# Altium PCB PCB1.PcbDoc (part 2 of 2)
Units mil, origin at the board's own origin, x right, y up, seen from the top; angles counter-clockwise.
Board outline 2521.04 x 1050 mil, 4 copper layers (Layer 1, Layer 2, Layer 3, Layer 4), stack 61.583 mil thick; 66 components, 75 nets, 299 pads, 167 vias.
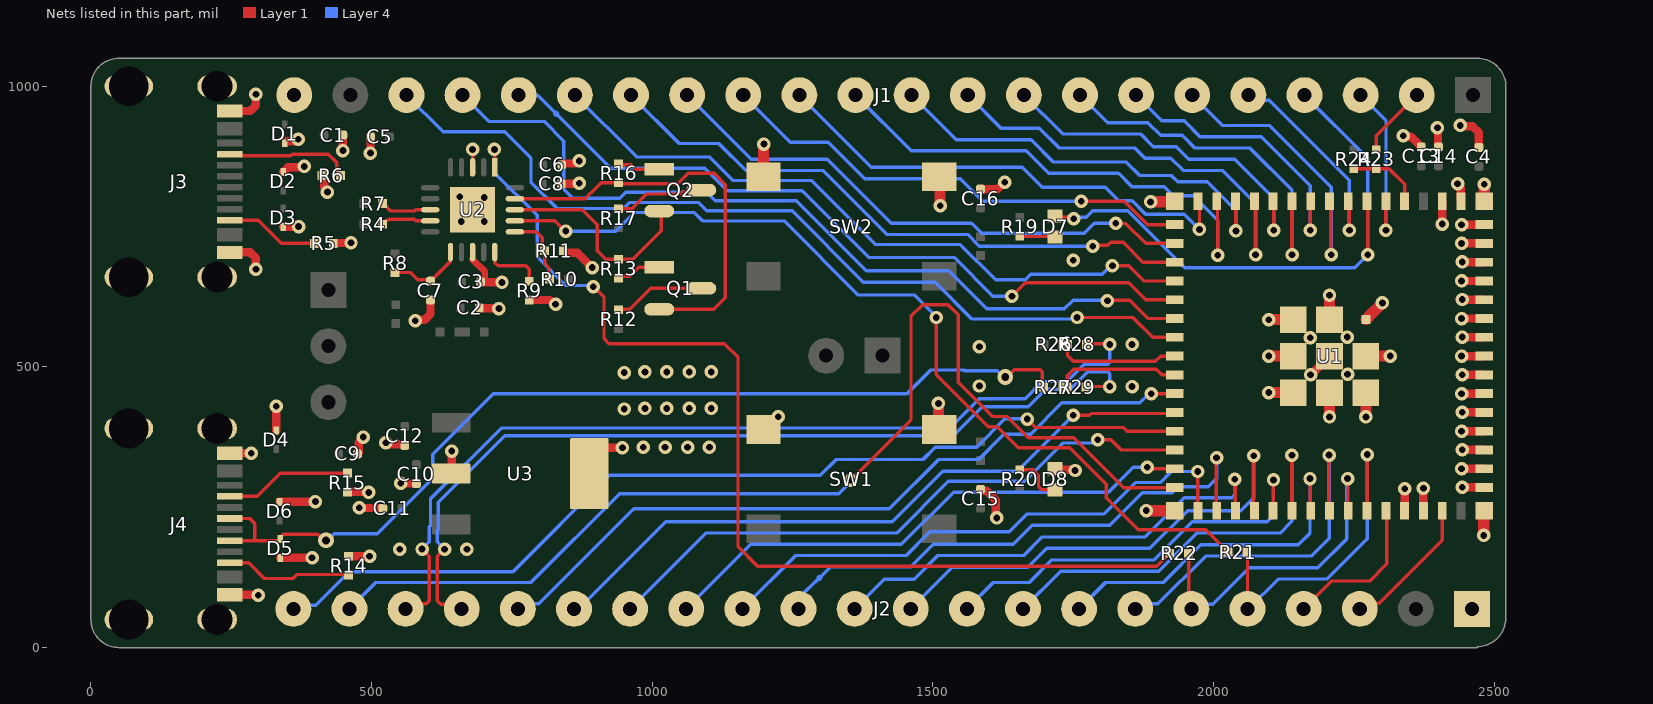
[diagram p4: the nets of this part, all layers, seen from the top]

## Via types
v1: diameter 24, hole 12, Layer 1 to Layer 4, tented both sides, 164 vias
v2: diameter 28, hole 14, Layer 1 to Layer 4, tented both sides, 3 vias

## Nets (pads, with @x,y where several pads share a name; then routed paths per layer and width w, separated by ;. In a path a pad name is that pad's centre, name@x,y a point inside that pad or via, vN(x,y) a via of type N, cw(c..) or ccw(c..) an arc to the next point about the centre after c; other vN are vias at no path point) (continued)
CON2_USB_P: D5.2 J4.A6 J4.B6 R27.1 | length 1729.1
  Layer 1 w6.03: J4.B6@247.64,190.55 291.37,190.55 ; J4.A6@247.64,229.92 283.08,229.92 292,221 292,191.19 291.37,190.55 ; v2(419,191) 415.48,191 404.48,202 342.44,202 338.91,198.47 338.91,194.36 335.09,190.55 291.37,190.55 ; v2(1629,482) 1632.03,482 1645.22,495.19 1691.2,495.19 1694.74,491.66 1694.74,466.53 R27.1@1697.27,464
  Layer 4 w6.03: v2(419,191) 421.53,191 433.52,202.98 510.44,202.98 609.03,301.58 609.03,344.34 716.66,451.97 1453.97,451.97 1496.49,494.48 1555.23,494.48 1556.23,493.48 1614.48,493.48 1625.97,482 v2(1629,482)
CON_ESP_USB_N: J2.20 R28.1 | length 1626.2
  Layer 1 w6.03: J2.20@560.63,68.9 569.49,77.76 597.76,77.76 602.99,82.98 602.99,162.28 590,175.27 v1(590,175.54) ; R28.1@1773.46,541 1814,541 v1(1815,540)
  Layer 4 w6.03: v1(590,175.54) 590.27,175.54 602.99,188.25 602.99,214.94 605.02,216.97 605.02,264.86 731.2,391.05 1530.2,391.05 1582.3,443.14 1664.3,443.14 1695.19,474.03 1739.19,474.03 1770.16,505 1811.47,505 1815,508.53 v1(1815,540)
CON_ESP_USB_P: J2.19 R29.1 | length 1592.2
  Layer 1 w6.03: v1(630,175) 629.73,175 617.02,162.28 617.02,82.99 623.12,76.88 652.64,76.88 J2.19@660.63,68.9 ; R29.1@1776,465 v1(1815,465)
  Layer 4 w6.03: v1(630,175) 630,175.27 617.02,188.25 617.02,209.13 619.05,211.16 619.05,259.05 737.02,377.02 1536.02,377.02 1588.11,429.11 1670.11,429.11 1701,460 1745,460 1775.97,490.97 1811.47,490.97 1815,487.44 v1(1815,465)
CON_GPIO0: J1.2 R23.1 | length 127.4
  Layer 1 w6: R23.1@2290,886.73 2290,912.05 J1.2@2362.2,984.25
ESP_USB_N: R26.2 R28.2 U1.23 | length 219.1
  Layer 1 w6.03: R28.2@1740,540 1740,520 1749.97,510.03 1896.47,510.03 1905.7,519.26 U1.23@1931.14,519.26
ESP_USB_P: R27.2 R29.2 U1.24 | length 221.1
  Layer 1 w6.03: R29.2@1739.46,464 1739.46,484.46 1751,496 1898,496 1908.21,485.79 U1.24@1931.14,485.79
"FIDI DTR": Q2.2 R13.1 U2.18 | length 381.5
  Layer 1 w6: U2.18@755.41,780 780.55,780 875,780 902,753 902,707 917.27,691.73 R13.1@940,691.73 965.03,691.73 1016,742.71 1016,774.18 Q2.2@1012.58,777.6
"FIDI RTS": Q1.2 R16.1 U2.19 | length 731.3
  Layer 1 w6: U2.19@755.41,799.68 755.64,799.46 778.07,799.46 880.39,799.46 890.93,810 891,810 909.27,828.27 R16.1@940,828.27 942.13,826.14 1045.51,826.14 1064.08,844.72 1110.3,844.72 1130.08,824.93 1130.08,623.08 1109.6,602.6 Q1.2@1012.58,602.6
"FIDI RXD": R22.2 U2.1 | length 1849.4
  Layer 1 w6: v1(719,887.5) 719.19,887.31 U2.1@719.19,866.94 ; v1(895,642.95) 914.17,623.78 914.17,586.29 914.17,550.24 922.96,541.46 1128.54,541.46 1152.99,517.01 1152.99,179.61 1187.61,145 1899.27,145 R22.2@1922.27,168
  Layer 4 w6: v1(719,887.5) 719,846 795,770 795,696 846,645 892.95,645 v1(895,642.95)
"FIDI TXD": R21.2 U2.17 | length 1617.7
  Layer 1 w6: U2.17@755.41,760.31 826.13,760.31 844.45,742 v1(846,742) ; v1(1506,588) 1506,486.43 1598.89,393.54 1614.46,393.54 1652,356 1744,356 1808.99,291.01 1808.99,267.01 1866,210 1986.27,210 2019.46,176.81 2019.46,175.83 2025.28,170 R21.2@2026.27,170
  Layer 4 w6: v1(846,742) 934.82,742 967.82,775 1074.61,775 1089.61,760 1235,760 1367,628 1467.5,628 1506,589.5 v1(1506,588)
FTDI1_RESET: C7.2 R8.2 U2.11 | length 135.8
  Layer 1 w6: R8.2@542,668.27 568.73,668.27 582,655 602.87,655 C7.2@605,652.87 640.63,688.5 U2.11@640.63,704.59
FTDI1_USB_N: R4.2 U2.9 | length 89.6
  Layer 1 w6.03: R4.2@519.73,754 527.54,761.81 530.94,761.81 532.06,762.94 575,762.94 576.06,762.94 578.69,760.31 U2.9@604.59,760.31
FTDI1_USB_P: R7.2 U2.8 | length 91.3
  Layer 1 w6.03: R7.2@519.73,791 520.72,791 528.53,783.19 528.53,783.05 533.73,777.84 576.84,777.84 579,780 U2.8@604.59,780
GND: C1.1 C2.1 C3.1 C4.1 C5.1 C6.1 C7.1 C8.1 C9.1 C10.1 C11.1 C12.1 C13.1 C14.1 C15.1 C16.1 D1.1 D2.1 D3.1 D4.1 D5.1 D6.1 D8.2 J1.22 J2.1 J3.A1B12 J3.B1A12 J3.S1 J3.S2 J3.S3 J3.S4 J4.A1B12 J4.B1A12 J4.S1 J4.S2 J4.S3 J4.S4 R5.1 R6.1 R9.2 R11.1 R14.1 R15.1 SW1.1 SW1.2 SW2.1 SW2.2 U1.1 U1.2 U1.42 U1.43 U1.46 U1.47 U1.48 U1.49 U1.50 U1.51 U1.52 U1.53 U1.54 U1.55 U1.56 U1.57 U1.58 U1.59 U1.60 U1.61 U1.62 U1.63 U1.64 U1.65 U1.66 U1.67 U1.68 U1.69 U1.70 U1.71 U1.72 U1.73 U2.3 U2.13 U2.21 U3.2 U3.4 | length 3164.1
  Layer 1 w6: U2.13@680,691.62 U2.13@680,704.59 ; U2.3@680,855.41 v1(680,887.5) ; U1.42@2340.59,243.67 U1.42@2340.79,243.87
  Layer 1 w12: U2.13@680,691.62 701.87,669.75 C3.1@701.87,651 ; 703.29,649.53 703.29,650.53
  Layer 1 w15: J4.B1A12@247.64,94.09 296.91,94.09 v1(298,93) ; J4.A1B12@247.64,346.06 v1(285.83,346.06) ; J3.B1A12@247.64,703.94 283.91,703.94 294,693.84 v1(294,673.84) ; J3.A1B12@247.64,955.91 283.91,955.91 294,966 v1(294,986) ; D4.1@330,386.54 v1(330,430) ; D6.1@336,259.54 399.54,259.54 v1(400,260) ; D5.1@337,159.93 393.93,159.93 v1(394,160) ; D3.1@343,749.46 369.46,749.46 v1(370,750) ; D2.1@343,847.54 350.88,855.41 378.28,855.41 v1(380,857.13) ; D1.1@348.42,901.89 363.2,901.89 367.14,905.83 v1(369.58,905.83) ; v1@380.37,858.63 v1@381.72,857.28 ; R6.1@411.27,841 412.09,841 415.42,837.67 415.42,819.84 421.38,813.88 v1(421.38,811.45) ; R5.1@431.73,720 432.43,720.69 462.69,720.69 v1(463.39,721.39) ; v1@448.9,885.4 C1.1@448.87,913 ; R15.1@457,277.27 v1@495.13,277.27 ; R14.1@459,162.73 v1@496.46,162.75 ; C9.1@474.87,345 477.22,347.34 477.22,364.78 485,372.56 v1(485,375) ; v1(477.96,249.26) 478.59,248.63 518.5,248.63 C11.1@519.13,248 ; v1(498,881) 498.06,881.06 498.06,909.94 C5.1@498.13,910 ; v1(525.59,364.87) 528.03,364.87 530.43,362.47 556.66,362.47 C12.1@559,360.13 ; v1(551.81,292.51) 552.01,292.32 579.81,292.32 C10.1@580,292.13 ; v1(577.86,582.36) 579.59,584.08 595.08,584.08 605,594 C7.1@605,619.13 ; U3.2@641.97,310 643,311.03 v1(643,350) ; C2.1@691.87,605 692.37,604.5 726.5,604.5 v1(727,604) ; C3.1@694.29,651.53 695.29,650.53 703.29,650.53 ; C3.1@701.87,651 v1@731.95,651 ; R9.2@781,619.27 817.76,619.27 825.39,611.64 v1(827.82,611.64) ; C8.1@837.87,826 838.48,826.61 869.36,826.61 v1(869.97,827.22) ; C6.1@838.87,860 841.22,862.34 862.91,862.34 867.56,867 v1(870,867) ; R11.1@841.73,707 845.06,703.67 866.31,703.67 v1(893.08,676.9) ; U3.4@888.03,310 U3.4@888.03,321.55 ; U3.4@898.71,332.23 U3.4@888.03,321.55 ; v1(947,356) 914.98,356 888.03,329.05 U3.4@888.03,321.55 ; C15.1@1585,281.87 1587.34,279.53 1595.15,279.53 1612.34,262.34 1612.34,232.33 v1(1613.83,230.84) ; C16.1@1585,816.87 1615.06,816.87 1627.18,829 v1(1628,829) ; D8.2@1717.67,318.7 1719.43,316.94 v1@1749,316.94 ; v1(2173,486) 2173.47,486 U1.61@2206.73,519.26 ; v1(2338,912) 2339.72,910.28 2351.76,910.28 2367.82,894.21 2368.54,894.21 C13.1@2370.66,892.09 ; U1.42@2340.79,243.87 2340.79,282.79 v1(2341,283) ; U1.43@2374.05,243.67 v1@2374.03,283.97 ; v1(2399,926) 2400,925 2400,892.87 C14.1@2401,891.87 ; v1@2407.52,754.57 U1.2@2407.52,794.85 ; v1(2434.94,826.16) 2434.94,823.73 2440.61,818.06 2440.61,795.22 U1.1@2440.98,794.85 ; v1(2439.75,930.25) 2441.47,928.53 2461.78,928.53 2473,917.31 C4.1@2473,890.87 ; v1@2442.04,318.47 U1.47@2482.32,318.47 ; v1(2442.02,385.37) U1.49@2482.32,385.4 ; v1(2442.02,452.3) U1.51@2482.32,452.33 ; v1@2442.04,519.26 U1.53@2482.32,519.26 ; v1(2442.02,586.16) U1.55@2482.32,586.19 ; v1(2442.02,653.09) U1.57@2482.32,653.12 ; v1(2442.02,720.02) U1.59@2482.32,720.05 ; v1(2442.02,753.48) U1.60@2482.32,753.51 ; v1(2443.02,285.45) 2443.22,285.24 U1.46@2482.14,285.24 ; v1(2443.02,352.37) 2443.22,352.17 U1.48@2482.14,352.17 ; v1(2443.02,419.3) 2443.22,419.1 U1.50@2482.14,419.1 ; v1(2443.02,486.23) 2443.22,486.03 U1.52@2482.14,486.03 ; v1(2443.02,553.16) 2443.22,552.96 U1.54@2482.14,552.96 ; v1(2443.02,620.09) 2443.22,619.89 U1.56@2482.14,619.89 ; v1(2443.02,687.02) 2443.22,686.81 U1.58@2482.14,686.81 ; U1.65@2481.66,243.01 U1.65@2482.32,243.67
  Layer 1 w20: SW1.1@1198.5,388.58 1203.43,388.58 1223.6,408.75 1223.6,410.29 v1(1224.36,411.06) ; SW2.1@1198.5,838.58 v1@1198.5,886.5 ; v1(1510,434.87) 1510,390.08 SW1.2@1511.5,388.58 ; SW2.2@1511.5,838.58 1513,837.08 v1(1513,787) ; v1(1880,244) 1880.17,243.83 1930.97,243.83 U1.64@1931.14,243.67 ; v1(1888,794) 1888.42,794.42 1930.72,794.42 U1.63@1931.14,794.85 ; v1(2098.42,454.3) U1.73@2141.77,454.3 ; v1(2098.42,519.26) U1.72@2141.77,519.26 ; v1(2098.42,584.22) U1.71@2141.77,584.22 ; v1(2206.73,410.95) U1.70@2206.73,454.3 ; U1.69@2206.73,584.22 v1(2206.73,627.57) ; v1(2271.69,410.95) U1.68@2271.69,454.3 ; U1.67@2271.69,519.26 v1(2315.04,519.26) ; U1.66@2271.69,584.22 2276.6,589.13 2276.6,589.6 v1(2301,614) ; v1(2481.66,199.66) U1.65@2481.66,243.01 ; U1.62@2482.32,794.85 v1(2482.32,825.48)
  other v1: 496.47,162.76 550,175 670,175 495.13,276.27 2374,284 1753.44,315.44 2442.02,318.45 984,357 1023,357 1063,357 1102,357 950,425 987,426 1026,426 1066,426 1105,426 1855,465 1583,466 2239,487 950,490 987,491 1026,491 1066,491 1105,491 2442.02,519.23 1583,536 1855,540 2172.44,552.07 2238.44,553.07 732.42,650.53 1750,690 2407.54,754.55 660,759 701,759 701,802 657,803 448.94,885.37 1199.01,897
GPIO0: R23.2 R24.2 U1.4 | length 132.7
  Layer 1 w6: R24.2@2250,853.27 2312.73,853.27 2340.59,825.41 U1.4@2340.59,794.85
GPIO1: J1.3 U1.5 | length 310.7
  Layer 1 w6: U1.5@2307.12,794.85 2307.22,794.75 v1(2307.22,743.56)
  Layer 4 w6: J1.3@2262.2,984.25 2307.32,939.14 2307.32,743.66 v1(2307.22,743.56)
GPIO2: D7.2 J1.4 U1.6 | length 1042.6
  Layer 1 w6: D7.2@1717.67,768.7 1720.02,766.35 1748.65,766.35 v1(1751,764) ; U1.6@2274.06,794.54 2274.33,794.27 2274.33,700.67 v1(2275,700)
  Layer 4 w6: v1(1751,764) 1753.68,766.68 1773.22,766.68 1784.54,778 1847.43,778 1948.71,676.73 2251.73,676.73 v1(2275,700) 2275,871.46 J1.4@2162.2,984.25
GPIO3: J1.5 U1.7 | length 383.2
  Layer 1 w6: v1(2242.22,743.56) U1.7@2242.22,794.75
  Layer 4 w6: J1.5@2062.2,984.25 2071.17,975.29 2099.71,975.29 2242.22,832.78 v1(2242.22,743.56)
GPIO4: J1.6 U1.8 | length 529.4
  Layer 1 w6: v1@2209.33,700.67 U1.8@2209.33,794.27
  Layer 4 w6: J1.6@1962.2,984.25 2016.46,930 2100,930 2210,820 v1(2210,700)
GPIO5: J1.7 U1.9 | length 507.3
  Layer 1 w6: v1(2172.22,743.56) U1.9@2172.22,794.75
  Layer 4 w6: J1.7@1862.2,984.25 1908.15,938.31 1947.69,938.31 1976,910 2085,910 2172.22,822.78 v1(2172.22,743.56)
GPIO6: J1.8 U1.10 | length 656.5
  Layer 1 w6: v1@2139.33,700.67 U1.10@2139.33,794.27
  Layer 4 w6: J1.8@1762.2,984.25 1811.46,935 1883.17,935 1905.67,912.5 1944.5,912.5 1967,890 2065,890 2140,815 v1(2140,700)
GPIO7: J1.9 U1.11 | length 629.4
  Layer 1 w6: v1(2107.22,743.56) U1.11@2107.22,794.75
  Layer 4 w6: J1.9@1662.2,984.25 1731.46,915 1870,915 1892.5,892.5 1933.5,892.5 1956,870 2038,870 2107.22,800.78 v1(2107.22,743.56)
GPIO8: J1.10 U1.12 | length 777.4
  Layer 1 w6: v1@2074.33,700.67 U1.12@2074.33,794.27
  Layer 4 w6: J1.10@1561.98,983.7 1562.76,983.7 1621.46,925 1690,925 1725,890 1860,890 1878,872 1924,872 1946,850 2016,850 2075,791 v1(2075,700)
GPIO9: J1.11 U1.13 | length 750.7
  Layer 1 w6: v1(2039.99,742.29) U1.13@2039.99,793.48
  Layer 4 w6: J1.11@1462.2,984.25 1541.46,905 1675,905 1715,865 1845,865 1869,841 1925,841 1936,830 1989,830 2040,779 v1(2039.99,742.29)
GPIO10: J1.12 U1.14 | length 894.1
  Layer 1 w6: v1@2007.1,699.4 U1.14@2007.1,793
  Layer 4 w6: J1.12@1362.2,984.25 1461.46,885 1666.72,885 1706.72,845 1830.86,845 1854.86,821 1912,821 1928,805 1964,805 2007.77,761.23 v1(2007.77,698.73)
GPIO11: J1.13 U1.15 | length 863.1
  Layer 1 w6: v1(1975,745) U1.15@1975,796.19
  Layer 4 w6: J1.13@1262.2,984.25 1390.46,856 1659,856 1695,820 1807,820 1831,796 1854.89,796 1878.89,772 1948,772 v1(1975,745)
GPIO12: J1.14 U1.16 | length 864.8
  Layer 1 w6: v1(1764.25,795.31) 1840.69,795.31 1882.49,753.51 U1.16@1931.14,753.51
  Layer 4 w6: J1.14@1162.2,984.25 1246.01,900.45 1313.55,900.45 1379,835 1549,835 1589,795 1763.94,795 v1(1764.25,795.31)
GPIO13: J1.15 U1.17 | length 993.3
  Layer 1 w6: v1(1826,756) 1826.59,755.41 1843.59,755.41 1878.95,720.05 U1.17@1931.14,720.05
  Layer 4 w6: J1.15@1062.2,984.25 1176.46,870 1312,870 1426,756 1569,756 1587,738 1770,738 1788,756 v1(1826,756)
GPIO14: J1.16 U1.18 | length 1098
  Layer 1 w6: v1(1785,715) 1787,717 1812,717 1817,722 1839,722 1874.42,686.58 U1.18@1931.14,686.58
  Layer 4 w6: J1.16@962.2,984.25 1048.46,898 1119,898 1167,850 1303.72,850 1417.72,736 1562,736 1583,715 v1(1785,715)
GPIO15: J1.17 U1.19 | length 1226.8
  Layer 1 w6: v1(1820,680) 1849,680 1875.88,653.12 U1.19@1931.14,653.12
  Layer 4 w6: J1.17@862.2,984.25 972.46,874 1102,874 1144,832 1284,832 1398,718 1549,718 1612,655 1664.61,655 1674.61,665 1802.14,665 1817.14,680 v1(1820,680)
GPIO16: J1.18 U1.20 | length 1339.8
  Layer 1 w6: v1(1641,626) 1665,650 1849,650 1879.35,619.65 U1.20@1931.14,619.65
  Layer 4 w6: J1.18@762.2,984.25 795.75,984.25 828.37,951.63 ; 829.59,950.41 926,854 1093.72,854 1133.72,814 1267,814 1386,695 1538,695 1607,626 v1(1641,626)
  Layer 4 w10: 828.37,951.63 ccw(c862.2,984.25) 829.59,950.41
GPIO17: J1.19 U1.21 | length 1506.9
  Layer 1 w6: v1(1811,618) 1812,619 1851,619 1883.81,586.19 U1.21@1931.14,586.19
  Layer 4 w6: J1.19@662.2,984.25 709.2,937.25 807.75,937.25 842.75,902.25 842.75,816.25 858.78,800.22 942.12,800.22 952.9,811 1097.31,811 1112.31,796 1256.72,796 1381.72,671 1528,671 1595.68,603.32 1734.14,603.32 1749.82,619 1810,619 v1(1811,618)
GPIO18: J1.20 U1.22 | length 1584.1
  Layer 1 w6: v1(1757,588) 1856.54,588 1891.82,552.72 U1.22@1931.14,552.72
  Layer 4 w6: J1.20@562.2,984.25 627.46,919 737.18,919 764.18,892 780.55,875.63 784,872.18 784,829 830.78,782.22 949.58,782.22 960.36,793 1082.07,793 1097.07,778 1249.26,778 1376.26,651 1504,651 1569.68,585.32 1754.32,585.32 v1(1757,588)
GPIO21: J2.18 U1.25 | length 1329.3
  Layer 1 w6: v1(1889.05,452.33) U1.25@1931.14,452.33
  Layer 4 w6: J2.18@760.63,68.9 769.73,78 798,78 967,247 1422.18,247 1510.18,335 1581.46,335 1626.65,380.2 1674.2,380.2 1730,436 1868.93,436 1885.26,452.33 v1(1889.05,452.33)
GPIO26: J2.17 U1.26 | length 1215.5
  Layer 1 w6: v1(1750,414) 1779.07,414 1782,416.93 1929.21,416.93 U1.26@1931.14,418.87
  Layer 4 w6: J2.17@860.63,68.9 868.9,68.9 1024,224 1427.47,224 1517.47,314 1650,314 v1(1750,414)
GPIO33: J2.16 U1.28 | length 1102.7
  Layer 1 w6: v1(1794,370) 1817.45,370 1835.51,351.94 U1.28@1931.14,351.94
  Layer 4 w6: J2.16@960.63,68.9 1095.73,204 1435.75,204 1527.75,296 1663.49,296 1731.81,364.32 1784.53,364.32 1790.21,370 v1(1794,370)
GPIO34: J2.15 U1.29 | length 976
  Layer 1 w6: v1(1882,321) 1884.26,318.74 1930.88,318.74 U1.29@1931.14,318.47
  Layer 4 w6: J2.15@1060.63,68.9 1175.73,184 1444.04,184 1537.04,277 1813,277 1857,321 v1(1882,321)
GPIO35: J2.14 U1.31 | length 982.9
  Layer 1 w6: v1(1971.97,313.65) 1972.23,313.39 1972.23,243.92 U1.31@1972.48,243.67
  Layer 4 w6: J2.14@1160.63,68.9 1255.73,164 1452.32,164 1494.32,206 1636,206 1668,238 1805,238 1861,294 1904.77,294 1924.41,313.65 v1(1971.97,313.65)
GPIO36: J2.13 U1.32 | length 979.9
  Layer 1 w6: U1.32@2004.73,244.88 U1.32@2005.94,243.67 ; U1.32@2004.97,247.97 v1@2004.97,337.62
  Layer 4 w6: J2.13@1260.63,68.9 1261.04,88.42 1263.95,91.34 1297.92,123.92 ; 1298,124 1304.28,130 1318.28,144 1460.6,144 1500.6,184 1643,184 1677,218 1815,218 1873,276 1926.5,276 1937.15,286.65 1990.65,286.65 2005.57,301.57 v1(2005.57,338.22)
  Layer 4 w10: 1297.92,123.92 cw(c1330.46,90.01) 1298,124
GPIO37: J2.12 U1.33 | length 847.3
  Layer 1 w6: v1(2038,300) 2038.7,299.3 2038.7,244.37 U1.33@2039.41,243.67
  Layer 4 w6: J2.12@1360.63,68.9 1413.35,121.62 1466.5,121.62 1508.89,164 1661.72,164 1694.72,197 1878.58,197 1948.22,266.65 2032.79,266.65 2039,272.86 2039,299 v1(2038,300)
GPIO38: J2.11 U1.34 | length 860.6
  Layer 1 w6: U1.34@2071.19,248.68 v1@2071.19,341.18
  Layer 4 w6: J2.11@1460.63,68.9 1534.73,143 1669,143 1703,177 1886.86,177 1953.86,244 2049,244 2071.79,266.79 v1(2071.79,341.78)
GPIO39: J2.10 U1.35 | length 733.9
  Layer 1 w6: U1.35@2106.34,243.67 2106.64,243.97 2106.64,298.29 v1(2106.93,298.59)
  Layer 4 w6: J2.10@1560.63,68.9 1607.63,115.9 1672,115.9 1712.1,156 1894.15,156 1962.15,224 2096,224 2106.93,234.93 v1(2106.93,298.59)
GPIO40: J2.9 U1.36 | length 757.5
  Layer 1 w6: U1.36@2138.94,244.53 U1.36@2139.8,243.67 ; U1.36@2139.19,247.61 v1@2139.19,342.18
  Layer 4 w6: J2.9@1660.63,68.9 1727.73,136 1902.43,136 1970.43,204 2119,204 2139.79,224.79 v1(2139.79,342.78)
GPIO41: J2.8 U1.37 | length 622.2
  Layer 1 w6: v1(2172,301) 2172.63,300.37 2172.63,244.3 U1.37@2173.27,243.67
  Layer 4 w6: J2.8@1760.63,68.9 1807.63,115.9 1910.61,115.9 1977.72,183 2151,183 2172,204 v1(2172,301)
GPIO42: J2.7 U1.38 | length 639.7
  Layer 1 w6: U1.38@2205.4,248.32 v1@2205.4,342.4
  Layer 4 w6: J2.7@1860.63,68.9 1869.59,77.86 1900.86,77.86 1986,163 2174,163 2206,195 v1(2206,343)
GPIO45: J2.4 U1.41 | length 281.2
  Layer 1 w6: J2.4@2160.63,68.9 2210.19,118.46 2278.46,118.46 2309,149 2309,245.12 U1.41@2306.51,247.61
GPIO46: J2.3 U1.44 | length 249.8
  Layer 1 w6: J2.3@2260.63,68.9 2270.96,79.23 2295.23,79.23 2407.52,191.52 U1.44@2407.52,243.67
GPIO47: J2.22 U1.27 | length 1719.8
  Layer 1 w6: v1(1668,407) 1683,392 1839.8,392 1846.4,385.4 U1.27@1931.14,385.4
  Layer 4 w6: J2.22@360.63,68.9 367.23,75.5 400.5,75.5 460,135 752,135 923.67,306.67 1299.67,306.67 1328,335 1482.49,335 1504.49,357 1578,357 1628.38,407.38 1667.62,407.38 v1(1668,407)
GPIO48: J2.21 U1.30 | length 2010.4
  Layer 1 w6: v1(1354,298) 1461,405 1461,590 1482,611 1527,611 1545,593 1545,472.89 1606.34,411.54 1632.34,411.54 1669.89,374 1751.46,374 1840.45,285.01 U1.30@1931.14,285.01
  Layer 4 w6: J2.21@460.63,68.9 507.63,115.9 783.9,115.9 942,274 1332.74,274 1354,295.26 v1(1354,298)
NetD7_1: D7.1 R19.1 | length 63.5
  Layer 1 w6: R19.1@1655,733.27 1655.98,732.28 1716.69,732.28 D7.1@1717.67,731.3
NetD8_1: D8.1 R20.1 | length 89.1
  Layer 1 w6: R20.1@1655,316.73 1678.73,316.73 1688.2,307.26 1688.2,287.27 1694.18,281.3 D8.1@1717.67,281.3
NetJ3_A5: J3.A5 R6.2 | length 225.3
  Layer 1 w6: J3.A5@247.64,879.13 248.54,878.23 269.28,878.23 271.13,876.38 312,876.38 356.13,876.38 358.89,879.13 423.14,879.13 438.08,864.19 438.08,846.83 443.91,841 R6.2@444.73,841
NetJ3_B5: J3.B5 R5.2 | length 184.6
  Layer 1 w6: J3.B5@247.64,761.02 298.22,761.02 312,747.24 339.24,720 406.27,720 ; R5.2@398.27,717 R5.2@398.27,726
NetJ4_A5: J4.A5 R15.2 | length 226.5
  Layer 1 w6: J4.A5@247.64,269.29 296.29,269.29 337.73,310.73 R15.2@457,310.73
NetJ4_B5: J4.B5 R14.2 | length 217.9
  Layer 1 w6: J4.B5@247.64,151.18 280.82,151.18 309,123 360,123 367.2,130.2 450.87,130.2
NetQ1_1: Q1.1 R13.2 | length 80.5
  Layer 1 w6: R13.2@940,658.27 942.95,661.22 959.97,661.22 976.15,677.4 Q1.1@1012.58,677.4
NetQ1_3: Q1.3 R12.1 | length 163.3
  Layer 1 w6: R12.1@940,601.73 941.27,603 960.39,603 997.39,640 Q1.3@1087.42,640
NetQ2_1: Q2.1 R16.2 | length 76.4
  Layer 1 w6: R16.2@940,861.73 941.56,860.17 962.83,860.17 970.6,852.4 Q2.1@1012.58,852.4
NetQ2_3: Q2.3 R17.1 | length 161.2
  Layer 1 w6: R17.1@940,781.73 964.14,781.73 970,787.59 990.52,808.14 1052.96,808.14 1057.43,812.6 1085.03,812.6 Q2.3@1087.42,815
NetR9_1: R9.1 U2.15 | length 106.5
  Layer 1 w6: U2.15@719.37,704.59 719.6,704.36 719.6,685.86 725.45,680 775.14,680 781,674.14 R9.1@781,652.73
U0RXD: J2.5 R21.1 U1.40 | length 616.5
  Layer 1 w6: R21.1@2059.73,170 2060.63,169.1 J2.5@2060.63,68.9 ; U1.40@2273.66,243.67 2273.79,243.8 v1(2273.79,343.78)
  Layer 4 w6: J2.5@2060.63,68.9 2062.18,68.9 2115.28,122 2202,122 2273.79,193.79 v1(2273.79,343.78)
U0TXD: J2.6 R22.1 U1.39 | length 590.5
  Layer 1 w6: R22.1@1955.73,168 1955.73,73.8 J2.6@1960.63,68.9 ; U1.39@2239.6,247.59 v1@2239.6,300.4
  Layer 4 w6: J2.6@1960.63,68.9 1968.73,77 1999,77 2064,142 2186,142 2237.36,193.36 2237.36,299.36 v1(2239,301)
"VBUS SENSE": R10.1 R11.2 U2.16 | length 132.5
  Layer 1 w6: U2.16@755.41,740.63 793.37,740.63 804,730 804,711.27 R11.2@808.27,707 808.27,684.73 816,677 816,657.27 R10.1@817.27,656
pads on no net: J3.A8 J3.B8 J4.A8 J4.B8 U2.2 U2.4 U2.5 U2.6 U2.7 U2.14

## Polygon pours and split planes (outlines as drawn)
GND on Layer 1 "GND_L01_P017" (solid, pour order 17): 925,515 775,365 605,365 605,285 615,275 715,275 775,215 775,170 1130,170 1130,175 1130,515 1115,515
GND on Layer 1 "GND_L01_P016" (solid, pour order 16): 2330,645 2330,395 2082.51,395 2082.51,645 2095,645
"+5V BUS2" on Layer 1 "+5V_BUS2_L01_P015" (solid, pour order 15): 380,450 455,450 455,335 380,335
+5V on Layer 1 "+5V_L01_P013" (solid, pour order 13): 370,575 370,495 440,495 490,445 490,425 532.47,382.53 737.53,382.53 880,525 880,615 850,615 850,550 830,550 755,475 515,475 460,530 460,575
"+3V3 FIDI" on Layer 1 "+3V3_FIDI_L01_P004" (solid, pour order 4): 605,890 565,890 565,930 815,930 815,810 790,810 790,880 765,905 610,905 605,900
+3V3_REG on Layer 1 "+3V3_REG_L01_P007" (solid, pour order 7): 595,315.12 515,314.88 515,342.74 595,342.74
+3V3_REG on Layer 1 "+3V3_REG_L01_P006" (solid, pour order 6): 580,265 695,265 695,200 565,200 535,230 535,265 695,265
"+3V3 FIDI" on Layer 1 "+3V3_FIDI_L01_P005" (solid, pour order 5): 520,730 500,710 485,695 485,615 510,615 560,615 560,617.5 560,650 520,650 520,690 560,690 560,730
+3V3 on Layer 1 "+3V3_L01_P003" (solid, pour order 3): 2487,872 2487,847 2386,847 2386,822 2356,822 2356,872 2364,872
+3V3 on Layer 1 "+3V3_L01_P002" (solid, pour order 2): 1643,711 1643,649 1600,649 1600,566 1560,566 1560,711
GND on Layer 2 "GND_L02_P020" (solid, pour order 20): 2490,20 25,20 25,1030 2490,1030
+3V3 on Layer 2 "+3V3_L02_P019" (solid, pour order 19): 2490,1030 500,1030 500,490 745,490 1065,810 1665,810 1665,770 1520,625 1365,625 1365,530 1460,435 1505,435 1625,315 1655,315 1710,370 1710,700 1785,775 2490,775
GND on Layer 3 (split plane): 2474.94,1029.61 2479.66,1028.48 2484.14,1026.62 2488.28,1024.09 2491.97,1020.94 2495.13,1017.24 2497.66,1013.11 2499.52,1008.62 2500.65,1003.9 2500.99,999.58 2500.94,999.06 2500.94,56.44 2500.84,56.1 2500.45,52.18 2500.5,51.66 2500.16,47.34 2499.03,42.62 2497.17,38.13 2494.64,33.99 2491.48,30.3 2487.79,27.15 2483.65,24.61 2479.17,22.76 2474.45,21.62 2470.13,21.28 2469.61,21.34 2465.69,20.95 2462.88,20.1 50,20.1 49.5,20.05 45.31,20.38 40.73,21.48 36.38,23.28 32.37,25.74 28.79,28.79 25.74,32.37 23.28,36.38 21.48,40.73 20.38,45.31 20.05,49.5 20.1,50 20.1,1000 20.05,1000.5 20.38,1004.69 21.48,1009.27 23.28,1013.62 25.74,1017.63 28.79,1021.21 32.37,1024.26 36.38,1026.72 40.73,1028.52 45.31,1029.62 49.5,1029.95 50,1029.9 2470.1,1029.9 2470.62,1029.95

## Silkscreen, mask and mechanical layers (free items; w line width, h text height)
Top Overlay:
  lines w10: 543.43,114.65 573.43,114.65 ; 550,940 580,940 ; 1045,115 1075,115 ; 1050,935 1080,935 ; 1542.83,118.15 1572.83,118.15 ; 1549.41,938.5 1579.41,938.5 ; 2043.43,114.65 2073.43,114.65 ; 2049.41,938.5 2079.41,938.5
  text "BOOT-USER" at 1186,886 h40
  text "J1" at 2136,876 h40
  text "USER" at 1636,816 h40
  text "UART" at 16,586 h40
  text "USB1" at 201.11,586.16 h40
  text "+5V" at 226,506 h40
  text "3V3" at 1498.41,506.65 h40
  text "REG" at 1116,496 h40
  text "ESP" at 16,426 h40
  text "USB2" at 191,421 h40
  text "POWER" at 1626,186 h40
  text "J2" at 2126,126 h40
  text "RESET" at 1261,121 h40
Bottom Overlay:
  text "GND" at 384,889 h40 r90
  text "+5" at 484,889 h40 r90
  text "IO18" at 584,889 h40 r90
  text "IO17" at 684,889 h40 r90
  text "IO16" at 784,889 h40 r90
  text "IO15" at 884,889 h40 r90
  text "IO14" at 984,889 h40 r90
  text "IO13" at 1084,889 h40 r90
  text "IO12" at 1184,889 h40 r90
  text "IO11" at 1284,889 h40 r90
  text "IO10" at 1384,889 h40 r90
  text "IO9" at 1484,889 h40 r90
  text "IO8" at 1584,889 h40 r90
  text "IO7" at 1684,889 h40 r90
  text "IO6" at 1784,889 h40 r90
  text "IO5" at 1884,889 h40 r90
  text "IO4" at 1984,889 h40 r90
  text "IO3" at 2084,889 h40 r90
  text "IO2" at 2184,889 h40 r90
  text "IO1" at 2284,889 h40 r90
  text "IO0" at 2384,889 h40 r90
  text "3V3" at 2484,889 h40 r90
  text "<--PIN-->" at 2484,709 h40 r90
  text "ESP32 CUSTOMIZED USB-C" at 1849,611 h40
  text "2025" at 1844,516 h40
  text "IO47" at 384,294 h40 r90
  text "IO48" at 484,294 h40 r90
  text "USB-" at 584,294 h40 r90
  text "USB+" at 684,294 h40 r90
  text "IO31" at 784,294 h40 r90
  text "IO32" at 884,294 h40 r90
  text "IO33" at 984,294 h40 r90
  text "IO34" at 1084,294 h40 r90
  text "IO35" at 1184,294 h40 r90
  text "IO36" at 1284,294 h40 r90
  text "IO37" at 1384,294 h40 r90
  text "IO38" at 1484,294 h40 r90
  text "IO39" at 1584,294 h40 r90
  text "IO40" at 1684,294 h40 r90
  text "IO41" at 1784,294 h40 r90
  text "IO42" at 1884,294 h40 r90
  text "TXD" at 1984,294 h40 r90
  text "RXD" at 2084,294 h40 r90
  text "IO45" at 2184,294 h40 r90
  text "IO46" at 2284,294 h40 r90
  text "EN" at 2384,294 h40 r90
  text "GND" at 2484,294 h40 r90
Board Shape:
  lines w20: 2469.61,0 2430,0 50,0 cw(c50,50) 0,50 0,1000 cw(c50,1000) 50,1050 2470.1,1050 cw(c2470.1,999.06) 2521.04,999.06 2521.04,52.18 ; 2469.61,1.24 ccw(c2469.61,52.18) 2520.55,52.18